# EAGLE board Pryo-Sensor (EAGLE 5.11)
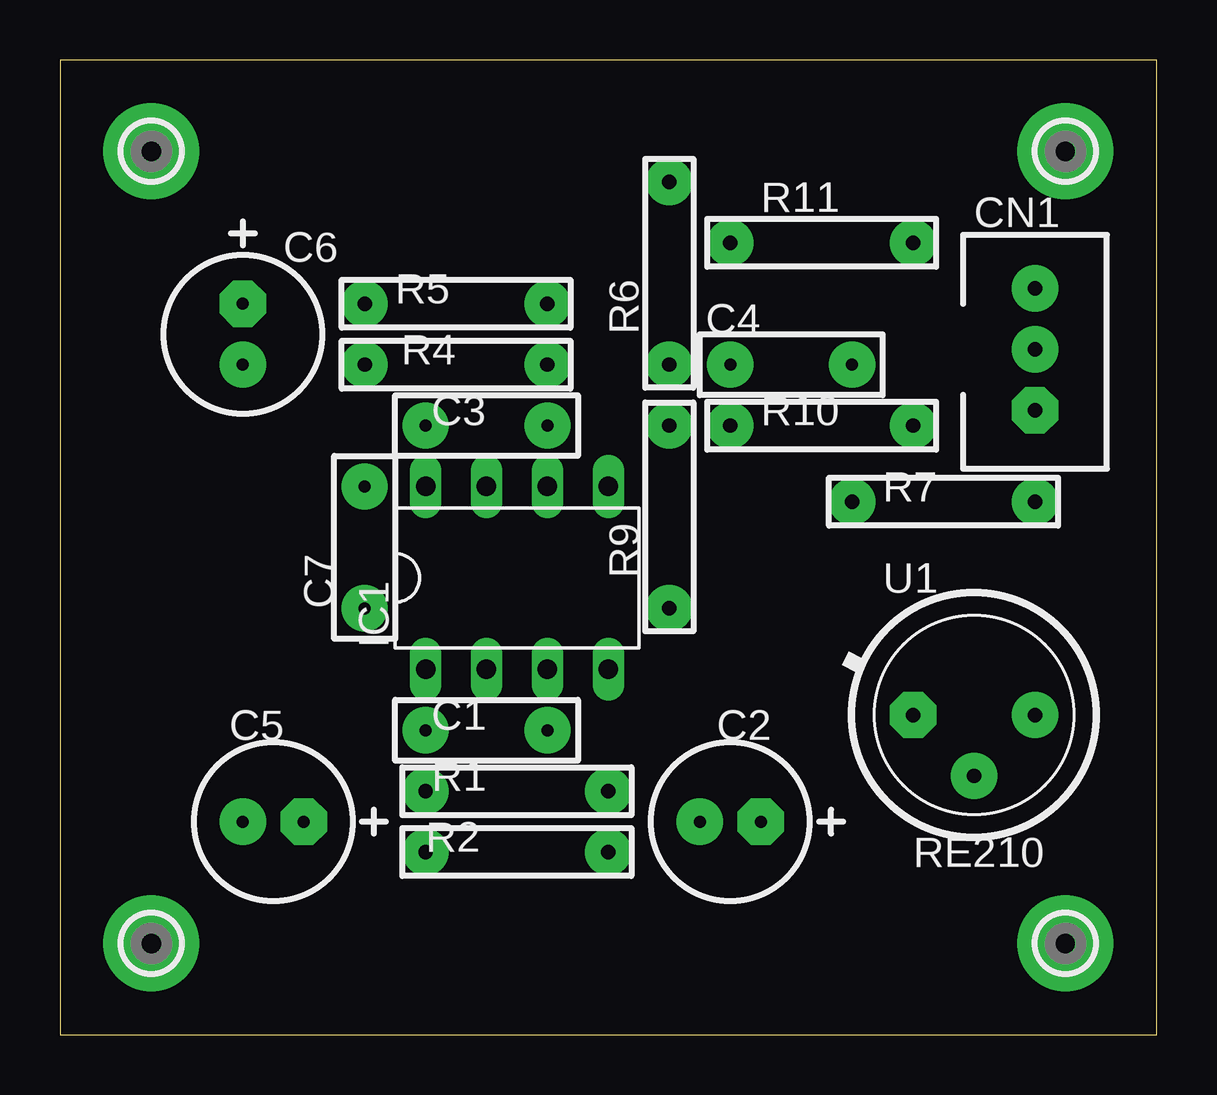
[diagram p0: board, top side]
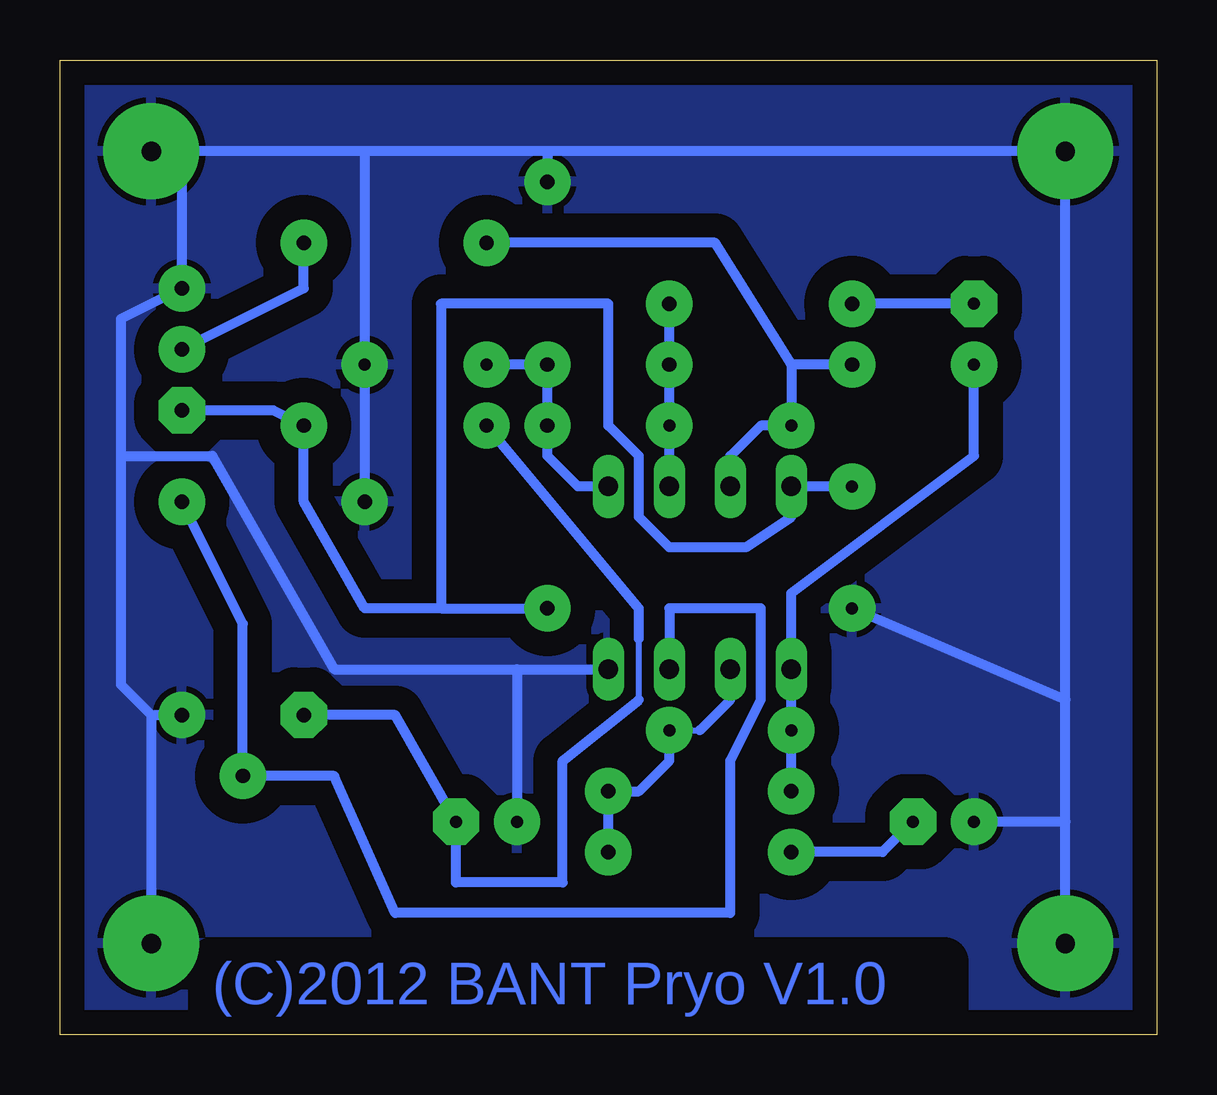
[diagram p1: board, bottom side, seen from below]

Size 45.72 x 40.64 mm. Coordinates in mm from the lower left corner, seen from the top.
Outline: 0,0 45.72,0 45.72,40.64 0,40.64 0,0
Copper layers (1*16): Top 0.035mm / dielectric 1.5mm / Bottom 0.035mm
Design rules "default": minimum track width 10mil, minimum drill 24mil, track to track 8mil, track to pad 8mil, pad to pad 8mil, via to via 8mil, smd to smd 8mil, copper to edge 40mil, drill to drill 8mil, minimum pad ring 10mil, minimum via ring 8mil, stop-mask expansion 4mil, vias tented up to drill 0mil, thermal gap 10mil

## Footprints (pad centres in the part's own frame; a part is rotated, then mirrored left to right if it is on the bottom)
CAP_DIP_2 = drill 0.5 pad 1.93 round: 1 -2.54,0; 2 2.54,0
CCAP_6.5 = drill 0.5 pad 1.93 octagon: + -1.27,0 | drill 0.5 pad 1.93 round: - 1.27,0
CON_HRS_DIP_3 = drill 0.6 pad 1.93 octagon: 1 -2.54,0 | drill 0.6 pad 1.93 round: 2 0,0; 3 2.54,0
DIL08 = drill 0.813 long: 1 -3.81,-3.81; 2 -1.27,-3.81; 3 1.27,-3.81; 4 3.81,-3.81; 5 3.81,3.81; 6 1.27,3.81; 7 -1.27,3.81; 8 -3.81,3.81
PAD-2.1 = drill 0.8 pad 4 round: B2,1 0,0
R_0.125W_3 = drill 0.6 pad 1.93 round: 1 -3.81,0; 2 3.81,0
RE210 = drill 0.6 pad 1.93 octagon: 1 -2.54,0 | drill 0.6 pad 1.93 round: 2 0,-2.54; 3 2.54,0

## Placement (x,y rotation side)
C1  0.01uF  [CAP_DIP_2]  17.78,12.7 180 top
C2  10uF  [CCAP_6.5]  27.94,8.89 180 top
C3  0.01uF  [CAP_DIP_2]  17.78,25.4 180 top
C4  0.1uF  [CAP_DIP_2]  30.48,27.94 180 top
C5  47uF  [CCAP_6.5]  8.89,8.89 180 top
C6  47uF  [CCAP_6.5]  7.62,29.21 270 top
C7  0.1uF  [CAP_DIP_2]  12.7,20.32 90 top
CN1  [CON_HRS_DIP_3]  40.64,28.57 90 top
IC1  LM358N  [DIL08]  19.05,19.05 0 top
MP1  MOUNT-PAD2.1  [PAD-2.1]  3.81,36.83 0 top
MP2  MOUNT-PAD2.1  [PAD-2.1]  41.91,36.83 0 top
MP3  MOUNT-PAD2.1  [PAD-2.1]  41.91,3.81 0 top
MP4  MOUNT-PAD2.1  [PAD-2.1]  3.81,3.81 0 top
R1  1M  [R_0.125W_3]  19.05,10.16 180 top
R2  10K  [R_0.125W_3]  19.05,7.62 0 top
R4  1M  [R_0.125W_3]  16.51,27.94 180 top
R5  47K  [R_0.125W_3]  16.51,30.48 0 top
R6  4.7K  [R_0.125W_3]  25.4,31.75 90 top
R7  47K  [R_0.125W_3]  36.83,22.23 0 top
R9  4.7K  [R_0.125W_3]  25.4,21.59 90 top
R10  10K  [R_0.125W_3]  31.75,25.4 0 top
R11  1K  [R_0.125W_3]  31.75,33.02 0 top
U1  RE210  [RE210]  38.1,13.34 0 top

## Library data of the parts
C1-C7 CN1 MP1-MP4 R1 R2 R4-R7 R9-R11 = MyLib
IC1 = linear4
U1 = akizuki

## Nets
N$1: IC1.3 R7.2 U1.2
N$2: C1.1 IC1.2 R1.1 R2.2
N$3: C5.+ R2.1
N$6: C2.+ R10.1 U1.1
N$7: C4.2 IC1.5 R6.1 R9.2
N$8: C1.2 C6.- IC1.1 R1.2
N$9: C6.+ R5.1
N$10: CN1.2 R11.2
N$11: C3.1 IC1.6 R4.1 R5.2
N$13: C3.2 IC1.7 R4.2 R11.1
V+: C7.2 CN1.1 IC1.8 R9.1 R10.2
V-: C2.- C4.1 C5.- C7.1 CN1.3 IC1.4 MP1.B2,1 MP2.B2,1 MP3.B2,1 MP4.B2,1 R6.2 R7.1 U1.3

## Tracks (layer width: path | path; a pad name or v marks a point on that pad's centre or on a via)
N$1
  Bottom 0.406: IC1.3 20.32,17.78 16.51,17.78 16.51,13.97 17.78,11.43 17.78,5.08 31.75,5.08 34.29,10.79 U1.2 38.1,17.14 R7.2
N$2
  Bottom 0.254: C1.1 19.05,12.7
  Bottom 0.406: R2.2 R1.1 21.59,10.16 20.32,11.43 C1.1 | 19.05,12.7 17.78,13.97 IC1.2
N$3
  Bottom 0.406: R2.1 11.43,7.62 C5.+
N$6
  Bottom 0.254: 21.59,13.97 21.59,16.51
  Bottom 0.406: U1.1 31.75,13.34 C2.+ 29.21,6.35 24.77,6.35 24.77,11.43 21.59,13.97 | R10.1 21.59,17.78 21.59,16.51
N$7
  Bottom 0.406: C4.2 R6.1 R9.2 25.4,24.13 24.13,22.86 IC1.5
N$8
  Bottom 0.406: R1.2 C1.2 IC1.1 15.24,18.41 7.62,24.13 C6.-
N$9
  Bottom 0.406: C6.+ R5.1
N$10
  Bottom 0.406: R11.2 35.56,31.11 CN1.2
N$11
  Bottom 0.406: IC1.6 C3.1 R4.1 R5.2
N$13
  Bottom 0.406: IC1.7 17.78,24.13 16.51,25.4 C3.2 15.24,27.94 | R4.2 15.24,27.94 | R11.1 18.41,33.02 15.24,27.94
V+
  Bottom 0.406: C7.2 IC1.8 15.24,21.59 17.14,20.32 20.32,20.32 21.59,21.59 21.59,24.13 22.86,25.4 22.86,30.48 29.84,30.48 29.84,17.78 | 29.84,17.78 33.02,17.78 35.56,22.23 R10.2 36.83,26.04 CN1.1 | 29.84,17.78 R9.1
V-
  Bottom 0.254: MP4.B2,1 5.08,3.81
  Bottom 0.406: R7.1 C4.1 33.02,36.83 | 3.81,13.97 C7.1 | MP4.B2,1 3.81,8.89 | 3.81,8.89 C5.- | 43.18,24.13 43.18,29.84 CN1.3 40.64,36.83 | 43.18,24.13 39.37,24.13 34.29,15.24 26.67,15.24 | 26.67,15.24 IC1.4 | 26.67,15.24 C2.- | 25.4,36.83 MP1.B2,1 3.81,13.97 | 25.4,36.83 33.02,36.83 | 33.02,36.83 40.64,36.83 | 40.64,36.83 MP2.B2,1 | 25.4,36.83 R6.2 | 3.81,8.89 3.81,13.97 | 41.91,13.34 MP3.B2,1 | 41.91,13.34 U1.3 | 41.91,13.34 43.18,14.61 43.18,24.13
  pour Bottom (isolate 1.016): 0,40.64 0,0 45.72,0 45.72,40.64

## Text on the board
Bottom: (C)2012 BANT Pryo V1.0